# Altium PCB PCB1.PcbDoc
Units mm, origin at the board's own origin, x right, y up, seen from the top; angles counter-clockwise.
Board outline 41.11 x 36.16 mm, 2 copper layers (Top Layer, Bottom Layer); 6 components, 10 nets, 16 pads, 0 vias.
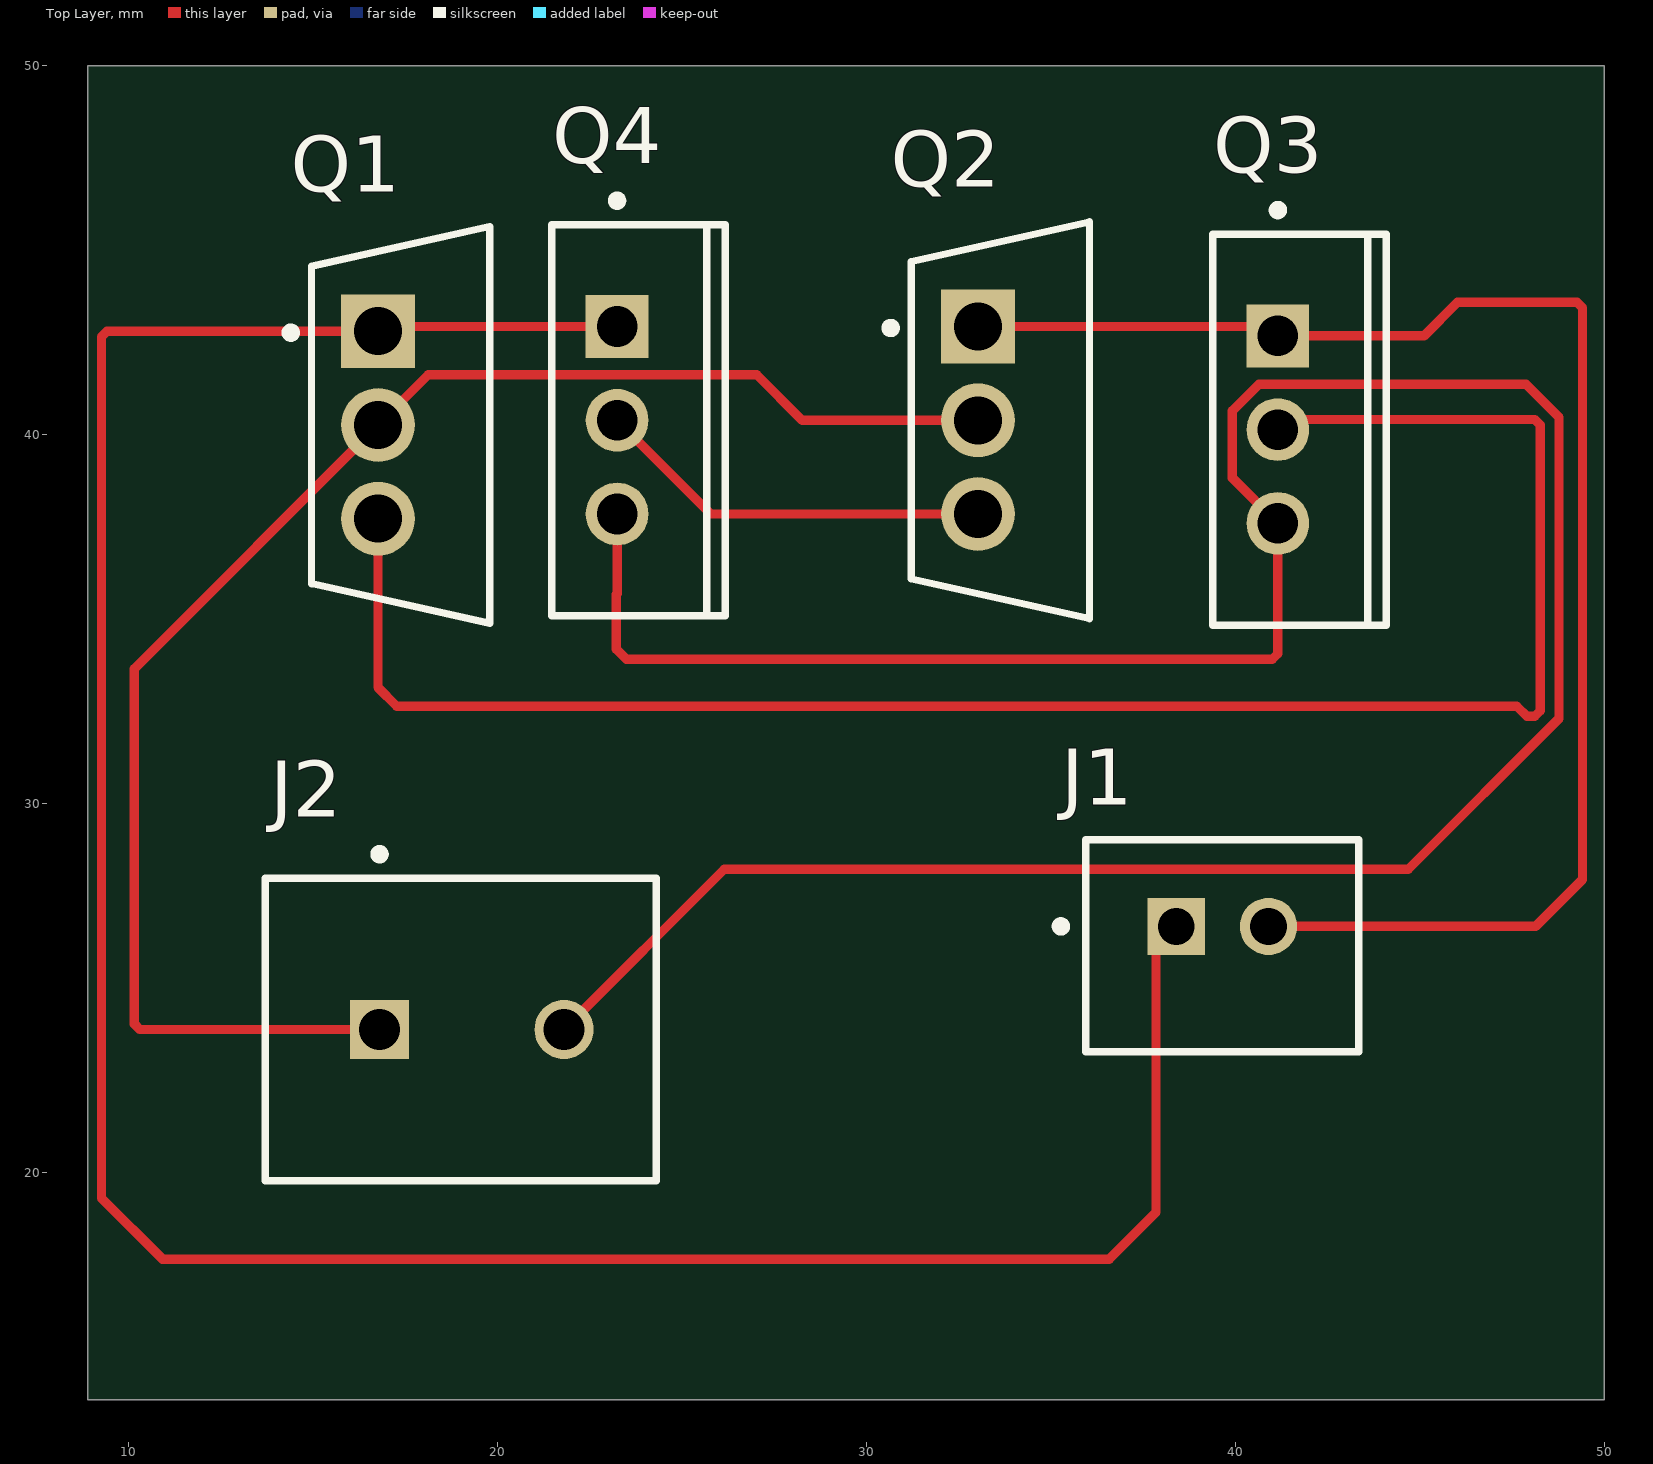
[diagram p0: Top Layer view]
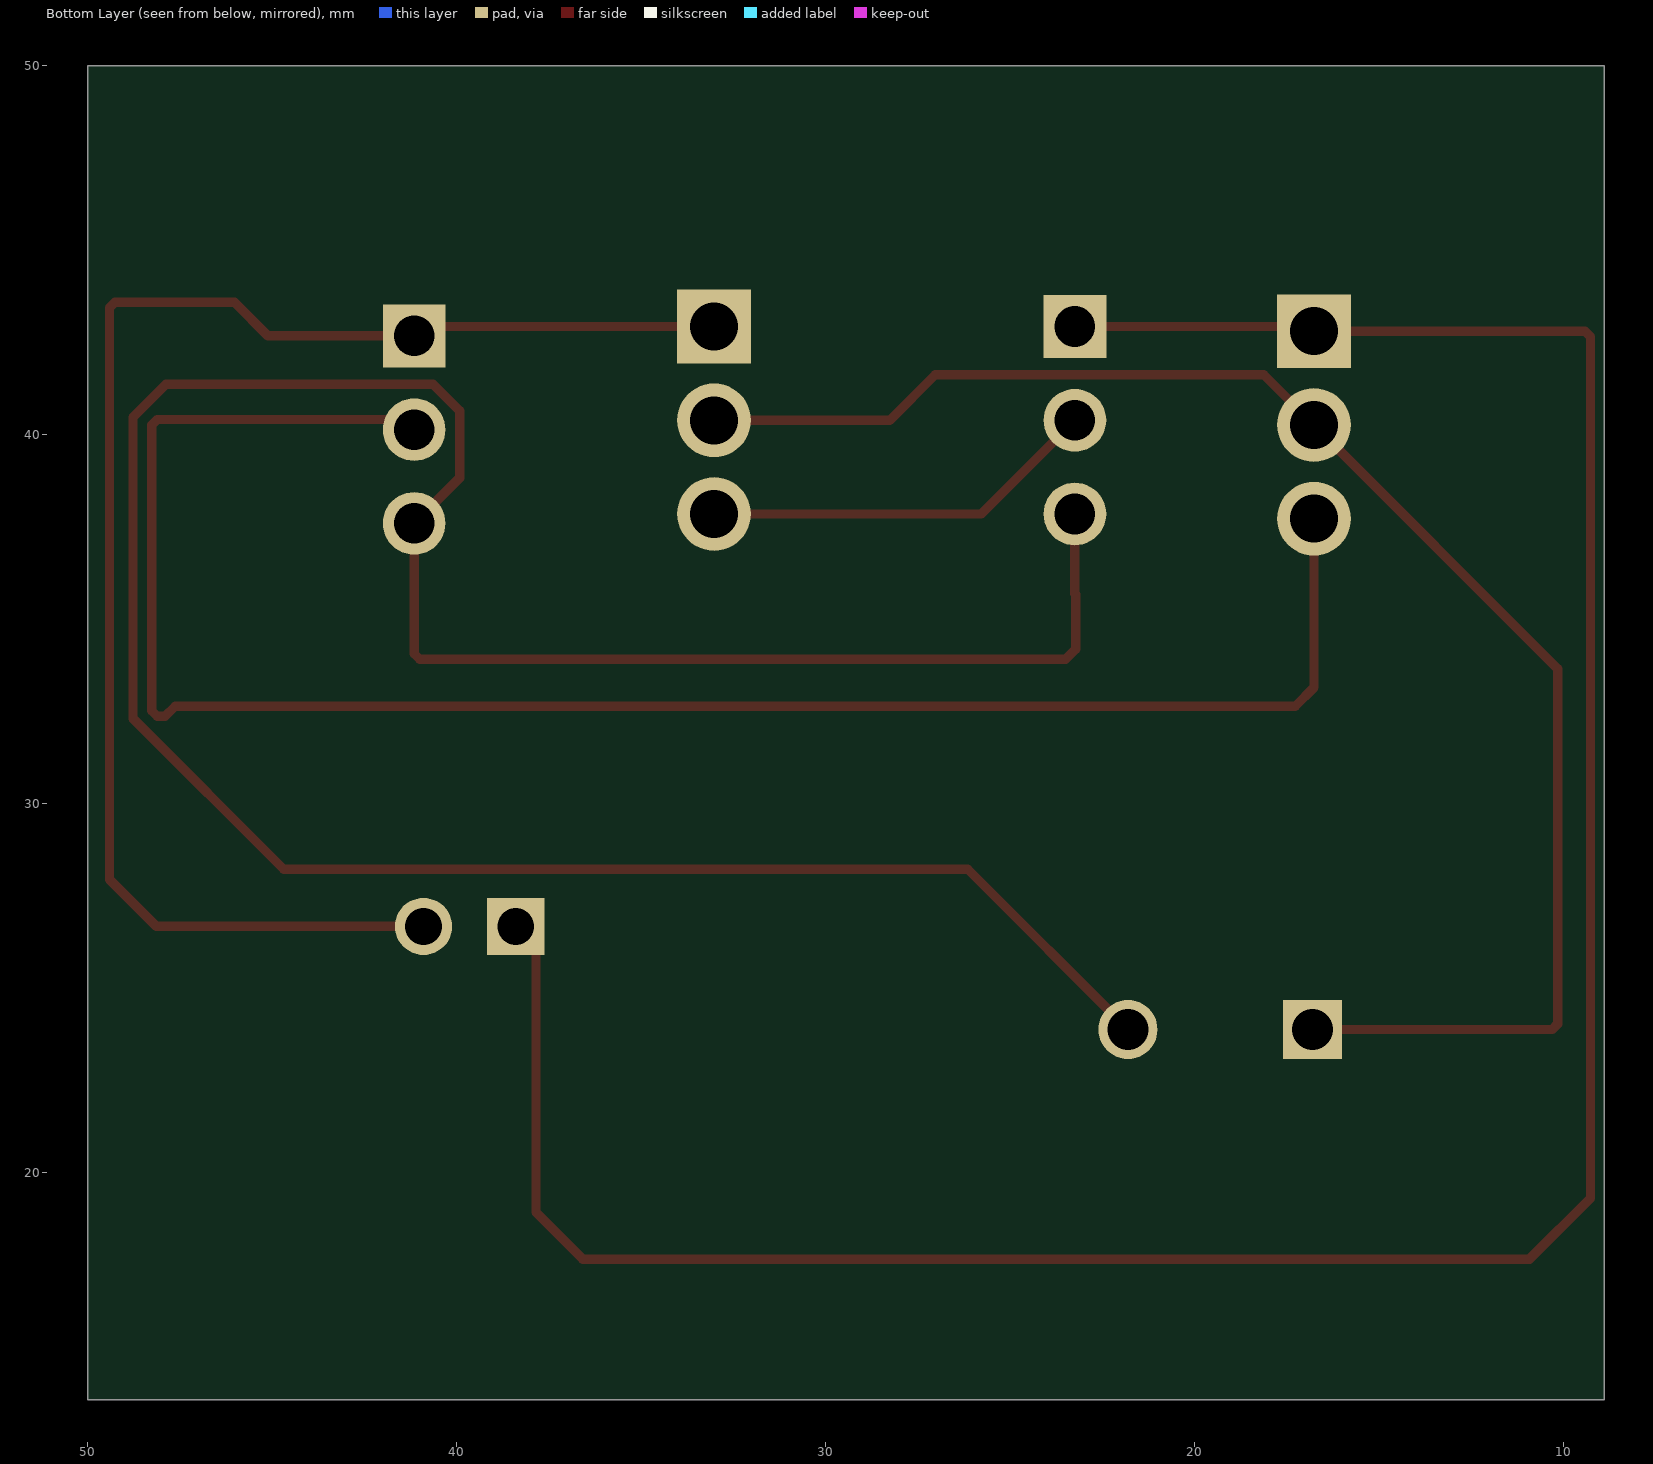
[diagram p1: Bottom Layer view, seen from below]
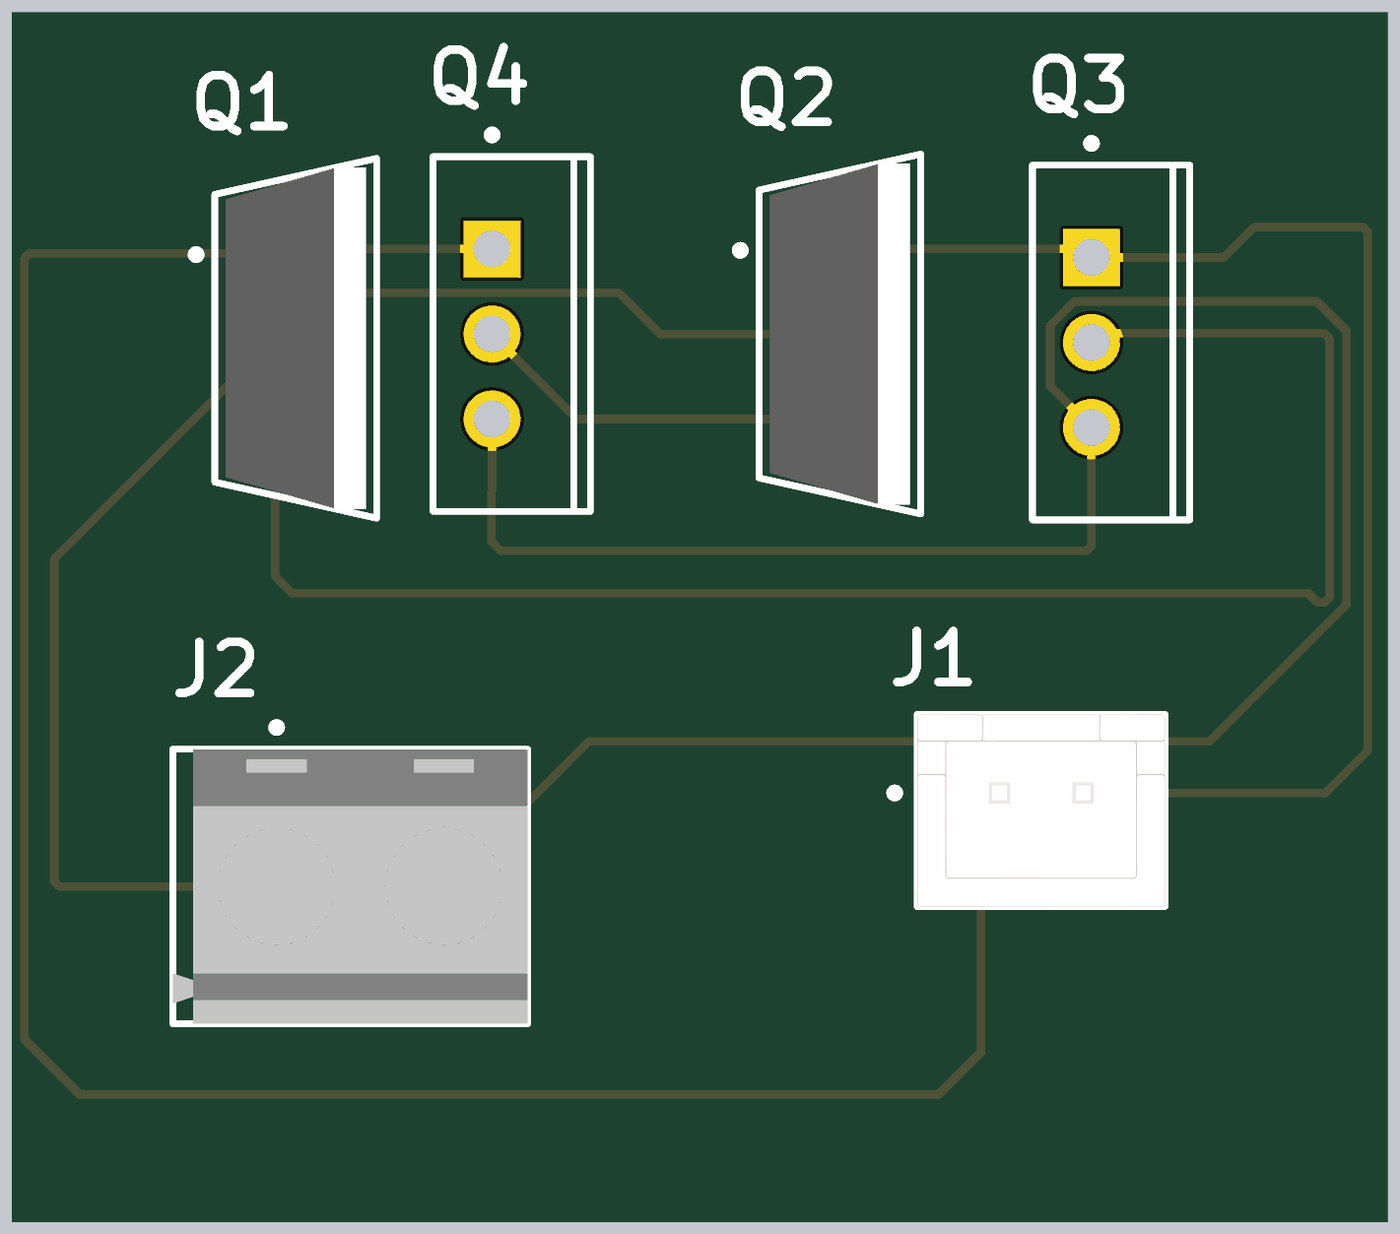
[diagram p2: 3D render of the assembled board from above, using the file's embedded part models]

## Layer stack, top to bottom
Top Solder: solder mask 0.0102, Solder Resist, Dk 3.5
Top Layer: signal copper 0.0356
Dielectric 1: dielectric 0.32, FR-4, Dk 4.8
Bottom Layer: signal copper 0.0356
Bottom Solder: solder mask 0.0102, Solder Resist, Dk 3.5

## Board outline
8.89,13.843 8.89,50 50,50 50,13.843

## Design rules (kind name [scope] priority, off if disabled: settings)
Clearance [All] p1: gap=0.254 ignorepadtopadclearanceinfootprint=FALSE
PolygonConnect [All] p1: connectstyle=Relief reliefconductorwidth=0.254 reliefentries=4 polygonreliefangle="90 Angle" airgapwidth=0.254
RoutingVias [All] p1: holewidth=0.711 width=1.27 viastyle="Through Hole" minholewidth=0.711 minwidth=1.27 maxholewidth=0.711 maxwidth=1.27
SolderMaskExpansion [All] p1: expansion=0.102 istentingtop=FALSE
Width [All] p1: maxlimit=0.254 minlimit=0.254 preferedwidth=0.254
30 further rules are at their usual default settings.

## Components (designator, comment, footprint, x,y, rotation, side; value= is the part's Value field where it differs from the comment)
J1 "B2B-XH-A(LF)(SN)" FP-B2B-XH-A_LF_SN-MFG 39.644,26.145 r0 top
J2 "282836-2" TECO-282836-2_V 19.304,23.876 r0 top
Q1 "IRF4905PBF" FP-PG-TO220-3-MFG 17.374,40.259 r0 top
Q2 "IRF4905PBF" FP-PG-TO220-3-MFG 33.63,40.386 r0 top
Q3 "IRF540" VISH-TO-220AB-3_A 41.148,40.132 r0 top
Q4 "IRF540" VISH-TO-220AB-3_A 23.241,40.386 r0 top

## Footprints (in the part's own frame and the unit in brackets; to place one, negate y for a bottom-side part, rotate by r counter-clockwise, add the part's x,y. Pads: shape width x height; smd on the part's side, far side on the other; paste and mask are expansions set on the pad)
FP-B2B-XH-A_LF_SN-MFG [mm]
  rect 1.55x1.55 hole 1 paste-2539.97 mask+0: 1(-1.25,0.525)
  round 1.55 hole 1 paste-2539.97 mask+0: 2(1.25,0.525)
  silkscreen extent -4.5,-2.88 3.7,2.88, body extent -3.8,-2.98 3.8,2.98, height 0.25
FP-PG-TO220-3-MFG [mm]
  rect 2x2 hole 1.3 paste-2539.97 mask+0: 1(-0.61,2.54)
  round 2 hole 1.3 paste-2539.97 mask+0: 2(-0.61,0) 3(-0.61,-2.54)
  silkscreen extent -3.1,-5.38 2.41,5.38, body extent -2.51,-5.48 2.51,5.48, height 0.25
TECO-282836-2_V [mm] "Female Header, Pitch 5mm, 1 x 2 Position, Height 10mm"
  rect 1.6x1.6 hole 1.1: 1(-2.5,0)
  round 1.6 hole 1.1: 2(2.5,0)
  silkscreen extent -5.6,-4.1 5,4.87, body extent -5.6,-4.1 5,4.1, height 10
VISH-TO-220AB-3_A [mm] "FM, 3-Leads, Body 10.55x4.65mm, Pitch 2.54mm"
  rect 1.7x1.7 hole 1.1: 1(0,2.54)
  round 1.7 hole 1.1: 2(0,0) 3(0,-2.54)
  silkscreen extent -1.77,-5.3 2.94,6.07, body extent -1.74,-5.28 2.91,5.28, height 19.31

## Part data
J1: library part CMP-2000-05888-3, "CONN HEADER VERT 2POS 2.5MM", Color=Natural, Contact Resistance=20mR, Current Rating=3A, Housing Color=White, Insulation Resistance=1GR, Max Operating Temperature=85°C, Max Voltage Rating (AC)=250V, Min Operating Temperature=-25°C, Connector Type="Male Pin", Contact Material=Brass, Contact Plating=Tin, Contact Type="Male Pin", Depth=5.75mm, Fastening Type=Detent, Housing Material=Polyamide, Lead Free="Lead Free", Lead Pitch=2.5mm, Length=7.4mm, Max Current Rating=3A, Max Voltage Rating (DC)=250V, Mount="Through Hole", Number of Contacts=2, Number of Positions=2, Number of Rows=1, Orientation=Straight, Packaging=Bulk, Pitch=2.5mm, REACH SVHC="No SVHC", Series=XH, Termination=Solder, Voltage Rating=250V, Voltage Rating (AC)=250V, Wire/Cable Gauge=22AWG
J2: library part CMP-1684-00017-1, "Female Header, Pitch 5 mm, 1 x 2 Position, Height 10 mm, Tail Length 3.5 mm, Rohs, Bulk", Color=Green, Current=13.5A, Manufacturer="TE Connectivity", Package Description="Female Header, Pitch 5 mm, 1 x 2 Position, Height 10 mm, Tail Length 3.5 mm", Package Reference=THD, Standard Package=300, Voltage=300V, 3D Model=282836-2.pdf, Category=Connectors,Interconnects, Clamp Material - Plating=Brass-NickelPlated, Contact Material - Plating=Brass-TinPlated, Datasheet URL=http://www.te.com.cn/commerce/DocumentDelivery/DDEController?Action=showdoc&DocId=Catalog+Section%7F1308389_EUROSTYLE_TERMINAL_BLOCKS%7F0607%7Fpdf%7FEnglish%7FENG_CS_1308389_EUROSTYLE_TERMINAL_BLOCKS_0607.pdf%7F282836-2, Dynamic Catalog=BuchananSeries, Family=TerminalBlocks-WiretoBoard, Featured Product=EurostyleTerminalBlockConnectors, Features=Interlocking(Side), Housing Material=Polyamide(PA66),Nylon6/6, Manufacturer URL=http://www.te.com, Mating Orientation=HorizontalwithBoard, Mounting Type=ThroughHole, Number of Levels=1, Other Names="5ULV-02B / A98076", Packaging=Bulk, Pitch="0.197\"(5.00mm)", Positions Per Level=2, Product Training Modules=Wire-to-BoardEurostyleTerminalBlocks, RoHS Information=282836-2StatementofCompliance, Screw Material - Plating=Brass-NickelPlated, Screw Thread=M3, Series=Buchanan, Torque - Screw=0.68Nm(6Lb-In), Wire Gauge=16-30AWG, Wire Termination=Screw-RisingCageClamp
Q1 Q2: library part CMP-32901-000200-1, "MOSFET P-CH 55V 74A TO-220AB", Case/Package=TO-220, Continuous Drain Current (ID)=74A, Drain to Source Breakdown Voltage=-55V, Drain to Source Resistance=20mR, Gate to Source Voltage (Vgs)=20V, Input Capacitance=3.4nF, Max Operating Temperature=175°C, Max Power Dissipation=200W, Min Operating Temperature=-55°C, Threshold Voltage=-4V, Drain to Source Voltage (Vdss)=-55V, Element Configuration=Single, Halogen Free="Halogen Free", Height=0.6inch, Lead Free="Lead Free", Length=0.414inch, Max Dual Supply Voltage=-55V, Mount="Through Hole", Number of Pins=3, Packaging=Rail/Tube, Power Dissipation=200W, Rds On Max=20mR, REACH SVHC="No SVHC", RoHS Compliant=Yes, Turn-Off Delay Time=61ns, Turn-On Delay Time=18ns, Width=0.185inch
Q3 Q4: library part CMP-2000-06461-1, "Power MOSFET, 100 VDS, -55 to 175 degC, 3-Pin TO-220AB, RoHS, Tube", Id - Continuous Drain Current=28A, Manufacturer=Vishay, Maximum Operating Temperature=+175C, Minimum Operating Temperature=-55C, Package / Case=TO-220-3, Package Description="3-Pin Flange Mount, Body 10.275 x 4.45 mm, Pitch 2.54 mm", Package Reference=TO-220AB-3, Pd - Power Dissipation=150W, Rds On - Drain-Source Resistance=77mOhms, Vds - Drain-Source Breakdown Voltage=100V, Vgs - Gate-Source Voltage=20V, &lt;PCN&gt;=http://www.mouser.com/PCN/Vishay_SIL_0182015.pdf, Brand=VishaySemiconductors, Channel Mode=Enhancement, Configuration=Single, Datasheet URL=http://www.vishay.com/docs/91021/91021.pdf, Datasheet Version="Rev. B, 03/2011", Factory Pack Quantity=50, Fall Time=43ns, Height=9.01mm, Length=10.51mm, Manufacturer URL=http://www.vishay.com/, Mounting Style=ThroughHole, Mounting Technology=ThroughHole, Number of Channels=1Channel, Package URL=http://www.vishay.com/docs/71195/to220ab.pdf, Packaging=Tube, Product Category=MOSFET, Rise Time=44ns, RoHS=NoRoHSVersionAvailable, Technology=Si, Transistor Polarity=N-Channel, Transistor Type=1N-Channel, Typical Turn-Off Delay Time=53ns, Typical Turn-On Delay Time=11ns, Unit Weight=0.211644oz, Width=4.7mm

## Nets (pads, with @x,y where several pads share a name; then routed paths per layer and width w, separated by ;. In a path a pad name is that pad's centre, name@x,y a point inside that pad or via, vN(x,y) a via of type N, cw(c..) or ccw(c..) an arc to the next point about the centre after c; other vN are vias at no path point)
12V: J2.1 Q1.2 Q2.2 | length 43
  Top Layer w0.254: J2.1 10.309,23.876 10.16,24.025 10.16,33.655 Q1.2 18.122,41.617 27.024,41.617 28.255,40.386 Q2.2
GND: J2.2 Q3.3 Q4.3 | length 77
  Top Layer w0.254: J2.2 26.146,28.218 44.684,28.218 48.768,32.302 48.768,40.469 47.874,41.363 40.638,41.363 39.917,40.642 39.917,38.823 Q3.3 41.148,34.058 40.999,33.909 23.495,33.909 23.219,34.185 23.219,35.671 23.241,35.692 Q4.3
NetD1_1: Q1.3 Q3.2 | length 51.8
  Top Layer w0.254: Q1.3@16.51,37.465 Q1.3 16.764,33.147 17.272,32.639 47.625,32.639 47.901,32.363 48.111,32.363 48.26,32.512 48.26,40.259 48.111,40.408 41.424,40.408 Q3.2
NetD2_1: Q2.3 Q4.2 | length 10.8
  Top Layer w0.254: Q4.2 25.781,37.846 Q2.3
NetQ1_1: J1.1 Q1.1 Q4.1 | length 75.2
  Top Layer w0.254: Q4.1 16.891,42.926 Q1.1 9.42,42.799 9.271,42.65 9.271,19.304 10.922,17.653 36.576,17.653 37.846,18.923 37.846,26.122 J1.1
NetQ2_1: J1.2 Q2.1 Q3.1 | length 41.5
  Top Layer w0.254: Q2.1 40.894,42.926 Q3.1 45.107,42.672 46.018,43.583 49.254,43.583 49.403,43.434 49.403,27.94 48.133,26.67 J1.2
NetQ3_1: 
NetQ4_1: 
"Signal 1": 
"Signal 2": 